# Altium PCB 新核心板PCB.PcbDoc (part 2 of 3)
Units mil, origin at the board's own origin, x right, y up, seen from the top; angles counter-clockwise.
Board outline 5840.03 x 4550.03 mil, 2 copper layers (Top Layer, Bottom Layer); 116 components, 170 nets, 698 pads, 425 vias.
Unrouted connection lines stored in the file: 1.
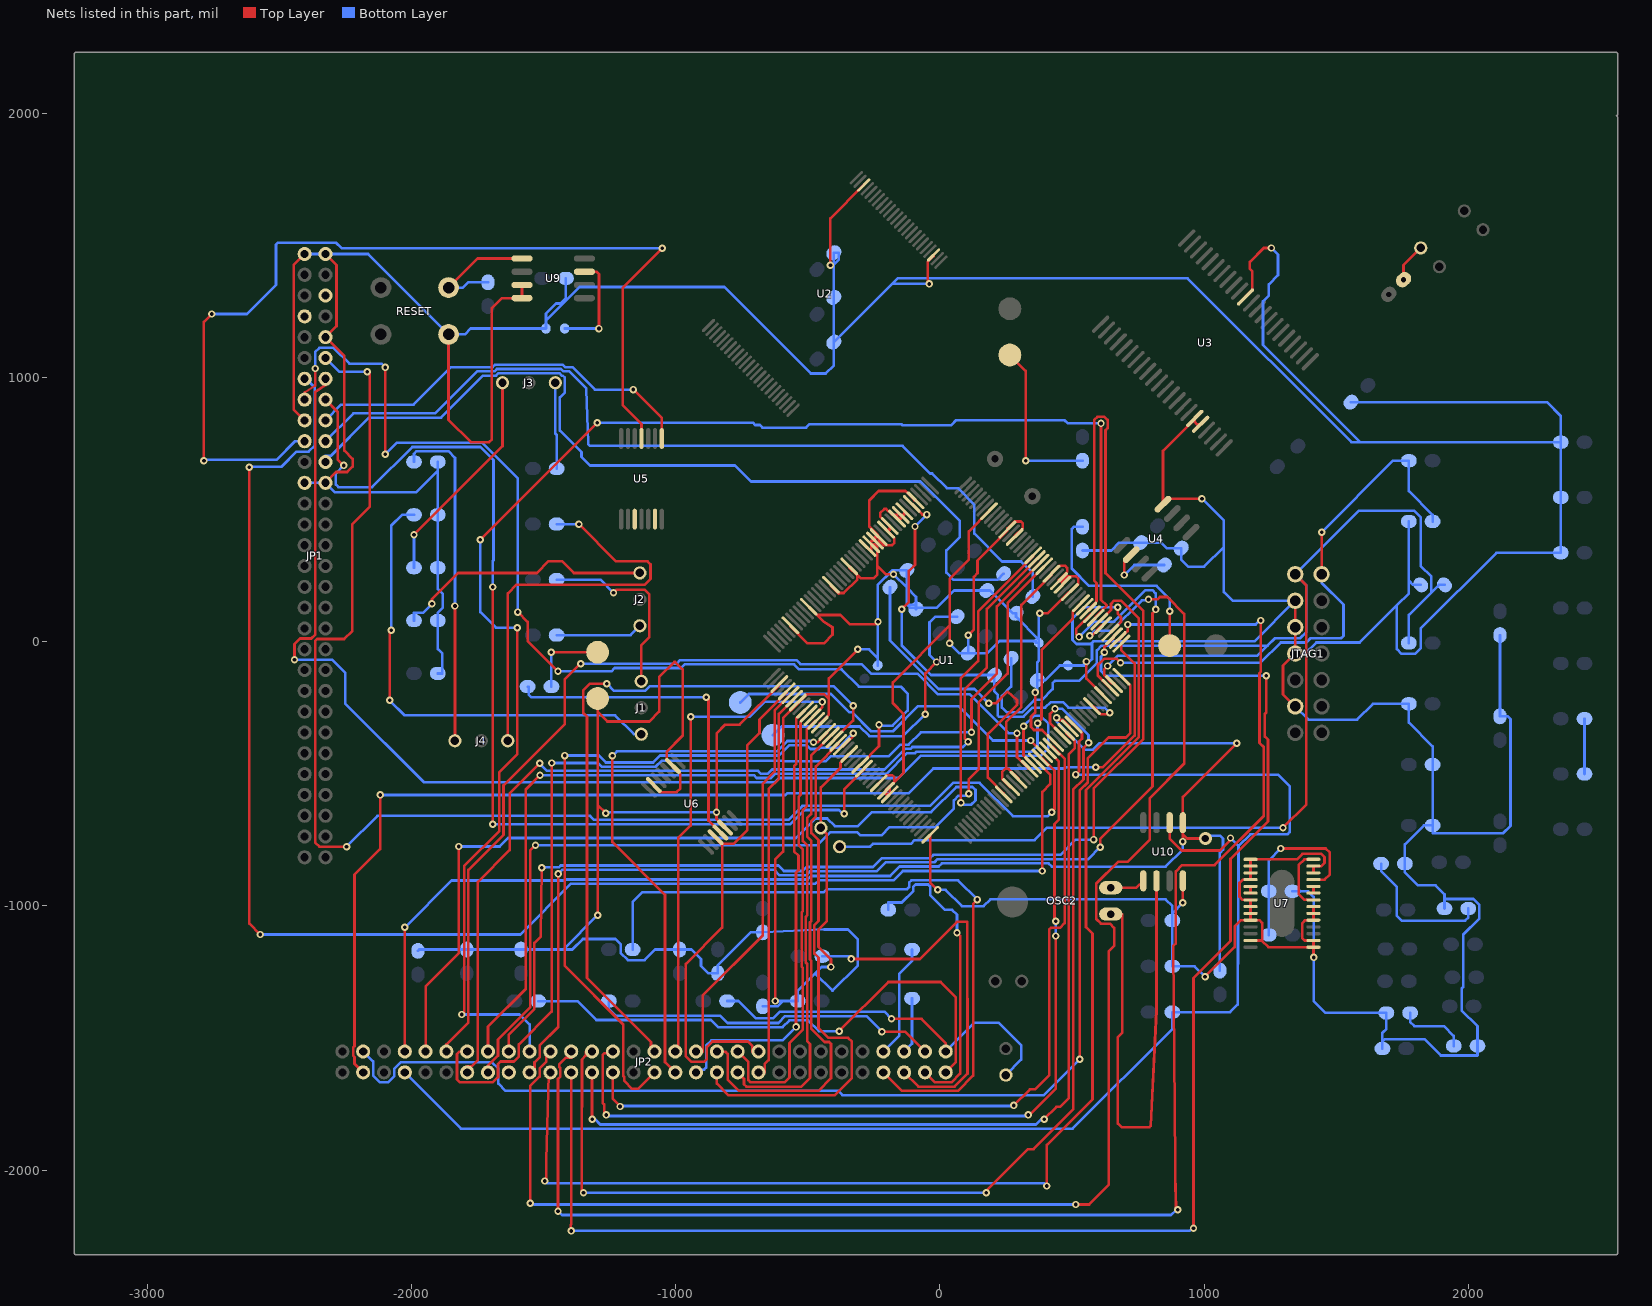
[diagram p2: the nets of this part, all layers, seen from the top]

## Via types
v1: diameter 28, hole 14, Top Layer to Bottom Layer, 424 vias
v2: diameter 50, hole 28, Top Layer to Bottom Layer, 1 vias

## Nets (pads, with @x,y where several pads share a name; then routed paths per layer and width w, separated by ;. In a path a pad name is that pad's centre, name@x,y a point inside that pad or via, vN(x,y) a via of type N, cw(c..) or ccw(c..) an arc to the next point about the centre after c; other vN are vias at no path point) (continued)
DSPREADY: C1.1 C2.1 C3.2 C4.2 C5.2 C6.2 C7.2 C8.2 C9.2 C10.2 C11.2 C12.1 C13.2 C14.2 C15.2 C16.2 C17.2 C22.2 C23.2 C24.2 C25.2 C27.2 C28.2 C29.2 C30.1 C33.2 C34.1 C38.1 C41.2 C42.2 C43.2 C44.2 C45.2 C46.1 C47.1 C48.1 C49.1 JCLK.1 JP1.37 JP1.38 JP1.44 JP1.51 JP1.59 JP1.60 JTAG1.4 JTAG1.8 JTAG1.10 JTAG1.12 PWM.K R1.2 R6.1 R8.2 R12.1 R13.1 R14.1 R15.1 R16.1 R20.1 R21.1 R22.1 R24.1 RESET.1 U1.3 U1.8 U1.14 U1.22 U1.30 U1.32 U1.33 U1.44 U1.58 U1.60 U1.70 U1.83 U1.92 U1.103 U1.105 U1.106 U1.108 U1.118 U1.120 U1.125 U1.137 U1.140 U1.141 U1.142 U1.144 U1.145 U1.147 U1.148 U1.149 U1.150 U1.155 U1.160 U1.166 U1.171 U2.27 U2.46 U3.12 U3.39 U3.40 U4.4 U6.5 U6.9 U6.13 U7.1 U7.2 U7.3 U7.4 U7.7 U7.8 U7.9 U7.10 U7.13 U7.15 U7.16 U7.19 U7.20 U7.21 U7.26 U7.27 U9.3 U9.4 U10.4 | length 43907.6
  Top Layer w10: JP1.44@-2403.74,837.44 -2445.51,879.21 -2445.51,1425.59 JP1.60@-2403.74,1467.36 ; JP1.37@-2325,601.22 -2284.22,642 -2243,642 -2222,663 -2222,692 -2253.23,723.23 -2253.23,1080.63 JP1.51@-2325,1152.4 -2283,1194.4 -2283,1425.36 JP1.59@-2325,1467.36 ; RESET.1@-1859.09,1162.83 -1859.09,839.09 -1775,755 -1706,755 -1695,766 -1695,1262 -1657,1300 U9.4@-1581.22,1300 U9.3@-1581.22,1350 ; v1(-1295,-1035) -1295,-618 ; PWM.K@-1295,-215 -1295,-265 ; v1(-1264,-649) -1295,-618 ; U6.13@-1082.38,-542.38 -1082.38,-546.04 -1058.95,-569.47 -996.47,-569.47 -982,-555 -982,-501.66 -1010,-473.66 U6.9@-1010,-470 -1034,-446 -1034,-417 -973,-356 -973,-105 -1002,-76 -1004,-76 -1062,-134 -1062,-265 -1099,-302 -1258,-302 -1295,-265 ; U6.5@-812.34,-703.85 -845,-671.19 v1(-845,-646) -844,-645 -844,-346.31 -812,-314.31 -757.16,-314.31 -607.2,-164.35 U1.3@-607.2,-160.42 ; v1(-623,-1360) -623,-824 -593,-794 -593,-289.35 U1.8@-537.6,-233.95 ; U1.171@-565.44,62.29 -565.44,58.36 -500.74,-6.33 -438.96,-6.33 -406.03,26.6 -406.03,55 -439.18,75.22 U1.166@-464.95,101 ; U1.8@-537.6,-230.02 U1.8@-537.6,-233.95 ; U1.166@-495.84,131.89 U1.166@-464.95,101 ; U1.14@-454.08,-313.53 -454.08,-309.61 -420,-275.52 -420,-216 ; v1(-414,1425) -414,1602.23 U2.46@-288.11,1728.11 ; U1.160@-412.32,215.4 -412.32,211.48 -382.88,182.04 -380.92,184 -364,184 -311.9,236.1 -311.9,250.25 -342.73,281.07 U1.155@-342.73,285 -297.73,240 -251.14,240 -236.14,255 -236.14,287.14 ; v1(-412,-1231) -412,-1202 -459,-1155 -459,-1089 -427.76,-1057.76 -427.76,-727.25 JCLK.1@-450,-705.01 -450,-551.1 -376,-477.1 -376,-458.16 U1.22@-342.73,-424.89 ; v1(-310,-29) -420,-139 -420,-216 ; U1.150@-273.13,354.6 -259.21,340.68 U1.149@-259.21,368.52 ; v1(-234,75) -243,66 -341,66 -376,101 U1.166@-464.95,101 ; U1.30@-231.37,-536.24 -200.13,-505 -180,-505 -172,-513 -172,-528.62 -203.53,-560.16 U1.32@-203.53,-564.08 -203.53,-578 U1.33@-189.61,-578 -189.61,-549.23 -137.62,-497.23 -137.62,-273.38 -178,-233 -178,-154 37,61 ; v1(-175.15,255) -204,255 -236.14,287.14 ; U1.140@-133.94,493.79 -133.94,479.87 U1.141@-147.86,479.87 -147.86,465.95 U1.142@-161.78,465.95 -161.78,479.87 -179.62,479.87 -202.75,503 -210,503 -226,487 -226,474.5 U1.144@-189.61,438.11 -189.61,424.19 U1.145@-203.53,424.19 -172,392.66 -172,373 -180,365 -213.93,365 -231.37,382.44 U1.147@-231.37,396.36 U1.147@-234.36,396.36 ; U1.137@-92.18,535.55 -96.11,535.55 -130.56,570 -232,570 -267,535 -267,435.91 -234.36,403.27 U1.147@-234.36,396.36 ; v1(-40,1354) -46,1360 -46,1436.51 -23.64,1458.86 U2.27@-23.64,1463.64 ; U1.44@-36.5,-731.12 -36.5,-910.5 v1(-8,-939) ; v1(37,-6) 37,61 ; v1(107.66,24.63) 129,45.96 129,245.18 142.82,259 142.82,307.28 255.81,420.27 U1.120@255.81,424.19 255.81,428.12 282.7,455.02 306.45,455.02 314.47,447 314.47,431.11 283.64,400.28 U1.118@283.64,396.36 ; U1.125@186.21,493.79 110,417.58 110,311 37,238 37,61 ; U1.58@269.73,-550.16 265.8,-550.16 236,-520.37 236,-492.37 247.27,-481.1 251,-481.1 ; U1.60@297.56,-522.33 297.56,-518.4 260.27,-481.1 251,-481.1 ; v1(361,-192) 361,-268 345,-284 345,-323 356,-334 387.63,-334 U1.70@436.76,-383.13 ; v1(378.22,107.06) 408,107.06 488.51,187.56 U1.103@492.44,187.56 524,219.13 524,239 516,247 482.28,247 464.6,229.32 ; U1.105@464.6,215.4 464.6,229.32 ; v1(554.88,-75) 554.88,-139.35 U1.83@617.71,-202.18 ; U1.92@645.55,34.45 686,74.9 686,93 673,106 v1(673,130) ; v1(920,-988) U10.4@920,-905 ; U3.39@964.98,845.02 U3.39@964.98,842.27 ; U3.40@987.25,822.75 973.24,822.75 964.98,831 U3.39@964.98,842.27 ; v1(992,541) 865.29,541 U4.4@844.64,520.36 844.64,721.93 U3.39@964.98,842.27 ; v1(1004,-1268) 1116,-1156 1116,-1077.98 1140,-1053.98 U7.10@1176,-1053.98 ; U3.12@1157.07,1304.36 1157.07,1306.11 1182.82,1331.86 1182.82,1401.57 1173.36,1411.03 1173.36,1437.36 1226,1490 v1(1255,1490) ; U7.13@1176,-1130.75 1217.75,-1130.75 1220,-1133 ; JTAG1.4@1345,-245 1299,-199 1299,-91 JTAG1.8@1345,-45 JTAG1.10@1345,55 JTAG1.12@1345,155 ; U7.21@1414,-1002.8 U7.20@1414,-1028.39 U7.19@1414,-1053.98 1383.02,-1053.98 1372,-1065 1372,-1122.75 1380,-1130.75 U7.16@1414,-1130.75 U7.15@1414,-1156.34 ; U7.26@1414,-874.84 U7.27@1414,-849.25 1444,-849.25 1456,-837.25 1456,-814.66 1444,-802.66 1372,-802.66 1351,-823.66 U7.1@1176,-823.66 U7.2@1176,-849.25 U7.3@1176,-874.84 U7.4@1176,-900.43 1146.57,-900.43 1134,-913 1134,-965 1146.2,-977.2 U7.7@1176,-977.2 U7.8@1176,-1002.8 U7.9@1176,-1028.39 U7.10@1176,-1053.98 ; v1(1415,-1195) 1414,-1194 U7.15@1414,-1156.34 ; -1295,-618 -1295,-265 ; U1.8@-537.6,-233.95 -502.65,-199 -437,-199 -420,-216 ; U1.149@-259.21,368.52 -259.21,382.44 U1.148@-245.29,382.44 -245.29,396.36 U1.147@-234.36,396.36 ; U1.149@-259.21,368.52 -245.66,368.52 -236.14,359 -236.14,354.6 -236.14,287.14 ; 251,-481.1 251,-304 308.61,-246.39 308.61,139.01 422.84,253.23 U1.108@422.84,257.16 453.68,288 473,288 482,279 482,264.57 450.68,233.25 U1.106@450.68,229.32 464.6,229.32 ; U7.10@1176,-1053.98 1210,-1053.98 1220,-1063.98 1220,-1133 ; 1220,-1133 1243.34,-1156.34 U7.15@1414,-1156.34
  Bottom Layer w10: JP1.38@-2403.74,601.22 JP1.37@-2325,601.22 -2288.78,565 -1982,565 -1900,647 ; JP1.60@-2403.74,1467.36 JP1.59@-2325,1467.36 -2163.62,1467.36 RESET.1@-1859.09,1162.83 -1797.52,1162.83 -1775.35,1185 C12.1@-1490.43,1185 -1490.43,1215 ; C49.1@-1975,-1170 -1970,-1165 C42.2@-1790,-1165 C46.1@-1585,-1165 -1425,-1165 ; C23.2@-1900,-120.28 -1882.5,-120.28 -1882.5,-45.09 -1900,-27.59 R13.1@-1900,79.86 -1900,110 -1881,129 -1881,180 -1900,199 R14.1@-1900,280 R12.1@-1900,480.14 -1900,647 ; R15.1@-1900,680.28 -1900,647 ; C11.2@-1415,1375 -1415,1301 -1436,1280 -1452,1280 -1490.43,1241.57 -1490.43,1215 ; v1(-1295,-1035) -1425,-1165 ; v1(-1264,-649) -1261,-646 v1(-845,-646) ; C47.1@-670,-1380 -614,-1380 -594,-1360 ; v1(-623,-1360) -594,-1360 ; v1(-414,1425) -404,1425 v1@-401.16,1427.84 ; v1(-412,-1231) -447.5,-1231 -471.75,-1255.25 ; v1(-310,-29) -268,-29 -234.94,-62.06 ; R1.2@-234.94,-89.94 -234.94,-62.06 ; v1(-234,75) v1@-234.94,74.06 ; v1(-175.15,255) -125,204.85 ; R22.1@-89.87,123.05 R22.1@-89.87,128.46 ; v1(-40,1354) -180.6,1354 ; v1(-8,-939) 21.35,-939 83.35,-1001 165.86,-1001 191.86,-975 854,-975 880,-1001 880,-1028 ; v1(37,-6) 75,-44 107.66,-44 R24.1@107.66,-43.58 ; v1(107.66,24.63) R24.1@107.66,-43.58 ; v1(361,-192) 369,-184 C3.2@369,-146.56 ; v1(378.22,107.06) 374.22,103.06 C1.1@374.22,9 ; R6.1@540,345 649,345 679,375 C28.2@760,375 837,375 858.36,353.64 C29.2@913.64,353.64 913.64,310.36 940,284 999.91,284 1075,359.09 ; v1(554.88,-75) 539.83,-90.05 ; v1(673,130) 545,130 502,87 502,7 518,-9 571.77,-9 576.25,-4.52 ; v1(920,-988) 880,-1028 ; v1(992,541) 1075,458 1075,359.09 ; v1(1004,-1268) 964.62,-1228.62 C22.2@880,-1228.62 C10.2@880,-1055.28 880,-1028 ; v1(1255,1490) 1280,1465 1280,1387.42 1245,1352.42 1245,1309.71 1223.36,1288.06 1223.36,1122.64 1591,755 ; R16.1@1335,-944.72 1393.72,-944.72 1415,-966 v1(1415,-1195) 1415,-1360 1460,-1405 C30.1@1690,-1405 1690,-1465 1675,-1480 1675,-1513 ; JTAG1.4@1345,-245 1395,-295 1579.19,-295 1639,-235.19 C14.2@1775,-235.19 1775,-306 1865,-396 C17.2@1865,-465.24 R8.2@1865,-695.28 ; JTAG1.8@1345,-45 1383,-45 1425,-3 1589,-3 1730,138 ; C13.2@1556.16,906.56 2298.44,906.56 2350,855 C8.2@2350,755 ; C34.1@1675,-1540 1675,-1513 ; C15.2@1775,454.95 1775,231 ; C16.2@1820,215 1791,215 1775,231 ; C41.2@1910,-1010 1910,-974 ; C5.2@2120,25 C9.2@2120,-282.5 2150,-282.5 2160,-292.5 2160,-697 2132,-725 1865,-725 R8.2@1865,-695.28 ; -1490.43,1215 -1362.99,1342.44 -815.44,1342.44 -488,1015 -432,1015 -401.16,1045.84 C27.2@-401.16,1133.44 ; -1425,-1165 -1391,-1165 -1351,-1125 -1227.5,-1125 -1207.5,-1145 -1207.5,-1177.5 -1180,-1205 -1117,-1205 -1077,-1165 C43.2@-984.72,-1165 -940,-1165 -904,-1201 -904,-1227 -876,-1255 C45.2@-840,-1255 -840,-1224 -716,-1100 C48.1@-670,-1100 -437,-1089 -348,-1089 -310,-1127 -310,-1225 -406,-1321 -471.75,-1255.25 ; -594,-1360 C44.2@-537.5,-1360 -537.5,-1321 -471.75,-1255.25 ; C27.2@-401.16,1133.44 -180.6,1354 ; C27.2@-401.16,1133.44 C24.2@-401.16,1302.66 v1@-401.16,1427.84 ; v1@-401.16,1427.84 -382,1447 -382,1471.88 C25.2@-401.16,1471.88 v1@-401.16,1427.84 ; -234.94,-62.06 v1@-234.94,74.06 ; v1@-234.94,74.06 -234.94,215 -179.94,270 C4.2@-125,270 -125,204.85 ; -180.6,1354 -159.6,1375 937.83,1375 1557.83,755 1591,755 ; -125,149 -125,204.85 ; -125,149 -125,140 -113.46,128.46 R22.1@-89.87,128.46 ; -125,149 -116,140 R22.1@-89.87,140 ; -125,204.85 -89.87,169.72 R22.1@-89.87,140 ; R22.1@-89.87,128.46 R22.1@-89.87,140 ; R22.1@-89.87,128.46 -10.92,128.46 54.43,193.82 R20.1@177.82,193.82 190,193.82 276.27,107.54 R21.1@288.54,107.54 288.54,94.67 C1.1@374.22,9 ; R24.1@107.66,-43.58 180,-43.58 226.28,2.7 363.76,2.7 363.76,-3.78 C1.1@374.22,-3.78 ; C3.2@369,-146.56 398,-146.56 454.51,-90.05 C2.1@484.95,-90.05 ; C3.2@369,-146.56 C3.2@368.84,-146.56 368.84,-78 374.22,-72.62 C1.1@374.22,-3.78 ; C1.1@374.22,-3.78 C1.1@374.22,9 ; C2.1@484.95,-90.05 539.83,-90.05 ; C2.1@484.95,-90.05 484.95,-91 538.88,-91 539.83,-90.05 ; 539.83,-90.05 552.6,-90.05 576.25,-66.4 576.25,-4.52 ; 576.25,-4.52 581.77,1 1191,1 JTAG1.12@1345,155 1108,155 1075,188 1075,359.09 ; 1591,755 C8.2@2350,755 ; 1675,-1513 1684,-1504 1834,-1504 1896,-1566 2035,-1566 C33.2@2035,-1530 2035,-1455 1975,-1395 1975,-1312 1981,-1306 1981,-1109 2041,-1049 2041,-995 2020,-974 1910,-974 ; 1730,138 1730,-28 1748,-46 1799,-46 1820,-25 1820,50 2106.43,336.43 C6.2@2350,336.43 C7.2@2350,545.71 C8.2@2350,755 ; 1730,138 1775,183 1775,231 ; R8.2@1865,-695.28 1831.72,-695.28 1760,-767 C38.1@1760,-840 1760,-873 1809,-922 1876,-922 1910,-956 1910,-974
ECAP1: JP2.33 U1.68 | length 3328.3
  Top Layer w10: v1(-1261.84,-1791) -1269.49,-1783.35 -1269.49,-1752.51 -1276,-1746 -1276,-1563.49 -1270.14,-1557.63 -1243.81,-1557.63 JP2.33@-1237.44,-1551.26 ; v1(335,-1791) 339,-1791 439,-1691 v1(439,-1114) ; U1.68@408.92,-410.97 449.94,-451.99 449.94,-674.06 434,-690 434,-1053 v1(439,-1058)
  Bottom Layer w10: v1(-1261.84,-1791) -1257.84,-1795 331,-1795 v1(335,-1791) ; v1(439,-1114) v1(439,-1058)
ECAP2: JP2.34 U1.69 | length 3123.6
  Top Layer w10: JP2.34@-1237.44,-1630 -1237.44,-1729.87 -1210,-1757.31 v1(-1210,-1759) ; v1@277.5,-1757.5 340.64,-1694.36 360.64,-1694.36 413.63,-1641.37 413.63,-1089.97 420.6,-1083 454,-1083 472.21,-1064.79 472.21,-442.5 426.76,-397.05 U1.69@422.84,-397.05
  Bottom Layer w10: v1(-1210,-1759) -1208.5,-1757.5 v1@277.5,-1757.5
  other v1: 280,-1755
ECAP3: JP2.35 U1.72 | length 4294.2
  Top Layer w10: v1(-1348.46,-2086) -1355,-2079.46 -1355,-1760.5 -1354,-1759.5 -1354,-1581 -1340,-1567 -1340,-1551.26 JP2.35@-1316.18,-1551.26 ; v1(175.22,-2086) 175.22,-2078.43 333.26,-1920.39 354.61,-1920.39 505,-1770 505,-560 544,-521 544,-402 v1(563,-383) ; v1(436,-254) 417,-273 417,-307.69 U1.72@464.6,-355.29
  Bottom Layer w10: v1(-1348.46,-2086) v1(175.22,-2086) ; v1(436,-254) 464,-254 563,-353 v1(563,-383)
ECAP4: JP2.36 U1.73 | length 3439.3
  Top Layer w10: JP2.36@-1316.18,-1630 -1316.02,-1630.16 -1316.02,-1806.84 v1(-1315.87,-1807) ; v1(395,-1807) 441.64,-1760.36 454.64,-1760.36 488.21,-1726.79 488.21,-425.7 511,-402.92 511,-377.78 478.52,-345.3 U1.73@478.52,-341.37
  Bottom Layer w10: v1(-1315.87,-1807) -1305.04,-1807 -1285.04,-1827 364.18,-1827 384.18,-1807 v1(395,-1807)
ECAP5: JP2.57 U1.88 | length 4560.1
  Top Layer w10: v1(530,-1580) 530,-562 560,-532 560,-441 638.46,-362.54 704.46,-362.54 721,-346 721,-166.27 U1.88@687.31,-132.58
  Bottom Layer w10: JP2.57@-2182.32,-1551.26 -2144.55,-1589.03 -2144.55,-1642.45 -2119.23,-1667.77 -2087.94,-1667.77 -2064.21,-1644.05 -2064.21,-1615.95 -2040.49,-1592.23 -1694.24,-1592.23 -1671,-1615.46 -1671,-1673 -1644,-1700 -384,-1700 -368,-1716 394,-1716 v1(530,-1580)
ECAP6: JP2.58 U1.89 | length 4424.5
  Top Layer w10: JP2.58@-2182.32,-1630 -2215,-1597.32 -2215,-1572 -2220.09,-1566.91 -2220.09,-1535.61 -2215,-1530.52 -2215,-882 -2118,-785 v1(-2118,-580) ; v1(590,-475) 617,-475 737.11,-354.89 737.11,-82.39 687.31,-32.59 U1.89@687.31,-7.31
  Bottom Layer w10: v1(-2118,-580) -583.91,-580 -576.92,-573.01 -117.16,-573.01 -24.15,-480 473,-480 478,-475 v1(590,-475)
EMU0: C15.1 JTAG1.13 R5.1 U1.85 | length 2229.8
  Top Layer w10: U1.85@645.55,-174.34 644.27,-174.34 597.77,-127.85 597.77,-89 621.77,-65 669.77,-65 v1(684,-79.23) ; JTAG1.13@1445,255 v1(1445,414)
  Bottom Layer w10: v1(684,-79.23) 1214.27,-79.23 1290.5,-3 1387,-3 1403,13 1519,13 1528,22 1528,140 1445,223 JTAG1.13@1445,255 ; v1(1445,414) 1716,685 R5.1@1775,685 1775,570 1865,480 C15.1@1865,454.95
EMU1: C16.1 JCLK.2 JTAG1.14 R7.1 R26.2 U1.86 | length 6388.1
  Top Layer w10: v1(635,-92) 622.84,-104.16 622.84,-127.72 652.55,-157.43 659.47,-157.43 U1.86@659.47,-160.42 ; v1(1299,-704) 1387,-616 1387,213 JTAG1.14@1345,255
  Bottom Layer w10: JCLK.2@-379.29,-775.72 -264,-775.72 -253.28,-765 -109,-765 -95,-751 358.35,-751 405.35,-704 v1(1299,-704) ; R26.2@270.07,-63.25 270.07,-169.76 235,-204.83 235,-249 253.62,-267.62 310.69,-267.62 358.07,-220.24 386.4,-220.24 427,-179.64 427,-157 436,-148 526.82,-148 594,-80.82 594,-33 612,-15 1240,-15 ; v1(635,-92) 673.16,-53.84 1201.16,-53.84 1240,-15 ; R7.1@1775,-5.14 1775,101.13 1860,186.13 ; C16.1@1910,215 1888.87,215 1860,186.13 ; 1240,-15 1268,13 1364,13 1387,36 1387,213 JTAG1.14@1345,255 1585,495 1796,495 1820,471 1820,285.91 1860,245.91 1860,186.13
EQEP1A: JP2.37 U1.90 | length 6045.1
  Top Layer w10: v1(-1445,-2155) -1445,-1654.76 -1435.89,-1645.65 -1435.89,-1614.35 -1440,-1610.24 -1440,-1599 -1416,-1575 -1394.92,-1575 JP2.37@-1394.92,-1551.26 ; U1.90@673.39,6.61 677.32,6.61 711,40.3 v1(711,65) ; v1(900,-2150) 894.14,-2150 891,-2015.51 891,-1973.02 884,-1158.66 884,-1150.37 886.93,-1147.44 893,-1141.37 893,-869 916,-846 1040,-846 1226,-660 1226,-399 1210,-383 1210,-118.64 1215,-113.64 v1(1215,80)
  Bottom Layer w10: v1(-1445,-2155) -1430,-2170 875.13,-2170 895.13,-2150 v1(900,-2150) ; v1(711,65) 1195.13,65 1210.13,80 v1(1215,80)
EQEP1B: JP2.38 U1.91 | length 5961.9
  Top Layer w10: v1(-1395,-2230) -1396.99,-2228.01 -1396.99,-2206.99 -1394.96,-2204.96 -1394.96,-1630.04 JP2.38@-1394.92,-1630 ; v1(623,-40) 623,-19.86 656.48,13.62 656.48,20.53 U1.91@659.47,20.53 ; v1(960,-2220) 960,-1273 1100,-1133 1100,-822 1242,-680 1242,-371 1230,-359 1230,-273.34 1235,-268.34 v1(1235,-129)
  Bottom Layer w10: v1(-1395,-2230) 945.13,-2230 955.13,-2220 v1(960,-2220) ; v1(623,-40) 623,-43 610,-56 610,-111 628,-129 v1(1235,-129)
EQEP1I: JP2.40 U1.95 | length 4859.1
  Top Layer w10: v1(-1495,-2041) -1490,-2036 -1490,-1965.15 -1490,-1964.85 -1480,-1636.34 JP2.40@-1473.66,-1630 ; v1(405,-2060) 405,-1905 578,-1732 578,-1104.63 553.53,-1080.16 553.53,-561.1 753.11,-361.51 753.11,87.89 686,155 660,155 648,143 648,120.42 U1.95@603.79,76.21
  Bottom Layer w10: v1(-1495,-2041) -1488.93,-2047.07 -1486,-2050 395,-2050 397.93,-2052.93 v1(405,-2060)
EQEP1S: JP2.39 U1.94 | length 5716.6
  Top Layer w10: v1(-1550,-2125) -1550,-1681.02 -1514.63,-1645.65 -1514.63,-1614.91 -1488.75,-1589.03 -1488.75,-1566.35 JP2.39@-1473.66,-1551.26 ; v1(515,-2130) 565,-2130 640,-2055 640,-1171 660,-1151 660,-1083.06 644,-1067.06 610.11,-1067.06 592.05,-1049 592.05,-915.95 675,-833 711,-833 795,-749 795,-592 925,-462 925,105 861,169 832.44,169 823.44,160 v1(790,160) ; v1(567,22) 573.49,22 613.78,62.29 U1.94@617.71,62.29
  Bottom Layer w10: v1(-1550,-2125) -1546.56,-2128.44 -1536.7,-2128.44 -1535.14,-2130 v1(515,-2130) ; v1(567,22) 587,42 650,42 764.56,156.56 786.56,156.56 v1(790,160)
EXINT1: JP1.48 U1.65 | length 5856.2
  Top Layer w10: v1(-2613,660) -2613,-1067 v1(-2572,-1108) ; U1.65@367.16,-452.73 417.94,-503.5 417.94,-539.07 388,-569.01 v1(388,-868)
  Bottom Layer w10: v1(-2613,660) -2611,662 -2491,662 -2434,719 -2389,719 -2365,743 -2365,961 -2382,978 -2382,994.92 JP1.48@-2403.74,994.92 ; v1(-2572,-1108) -1587.52,-1108 -1395.52,-916 -471,-916 -458,-903 -175,-903 -140,-868 v1(388,-868)
EXINT2: JP1.49 U1.66 | length 5309.6
  Top Layer w10: v1(-2245,-776) -2348,-776 -2363,-761 -2363,4 -2357,10 -2254,10 -2223,41 -2223,445 -2158,510 -2158,1012 v1(-2167,1021) ; U1.66@381.08,-438.81 385.01,-438.81 433.94,-487.74 433.94,-635.06 v1(424,-645)
  Bottom Layer w10: JP1.49@-2325,1073.66 -2272.34,1021 v1(-2167,1021) ; v1(-2245,-776) -2128,-659 -1323,-659 -1308,-674 -572.54,-674 -519.54,-621.01 -36.59,-621.01 50.41,-534 151,-534 277,-660 409,-660 v1(424,-645)
EXNMI: JP1.47 U1.64 | length 4684.2
  Top Layer w10: v1(-2442,-68) -2442,-9 -2421,12 -2378.77,12 -2363,27.77 -2363,945.37 -2325,971 JP1.47@-2325,994.92 ; v1(317,-320) 317,-430.41 U1.64@353.24,-466.65
  Bottom Layer w10: v1(-2442,-68) -2300,-68 -2250.5,-117.5 -2250.5,-233.8 -1952.3,-532 -623.67,-532 -607.68,-516 -156.18,-516 -72.17,-432 382,-432 411,-403 411,-310 382,-281 356,-281 v1(317,-320)
EXTCS0: JP1.43 U5.8 | length 1520.9
  Top Layer w10: v1(-1160,954) -1052.18,846.18 U5.8@-1052.18,768.9
  Bottom Layer w10: JP1.43@-2325,837.44 -2265.44,897 -1992,897 -1850,1039 -1692.17,1039 -1683.17,1048 -1426.83,1048 -1417.83,1039 -1389.78,1039 -1304.78,954 v1(-1160,954)
EXTCS1: JP1.42 U5.11 | length 3705.1
  Top Layer w10: v1(-2785,685) -2785,1210 v1(-2755,1240) ; U5.11@-1128.95,768.9 -1128.95,823.95 -1200,895 -1200,1339 v1(-1050,1489)
  Bottom Layer w10: v1(-2785,685) -2781,689 -2509.03,689 -2439.32,758.7 JP1.42@-2403.74,758.7 ; v1(-2755,1240) -2622.63,1240 -2512,1350.63 -2512,1503.28 -2506.14,1509.14 -2284.14,1509.14 -2264,1489 v1(-1050,1489)
FLASHCS: U5.3
HOLDAN: JP1.45 U1.26 | length 3986.1
  Top Layer w10: JP1.45@-2325,916.18 -2279,870.18 -2279,690 v1(-2256,667) ; v1(-1692,-691) v1(-1692,207) ; v1(-362,-651) -362,-559.44 -287.05,-484.49 U1.26@-287.05,-480.57
  Bottom Layer w10: v1(-2256,667) -2286,637 -2286,595 -2276,585 -2148,585 -1996,737 -1738.63,737 -1689,687.37 -1689,308.39 -1692,305.39 v1(-1692,207) ; v1(-1692,-691) -566.91,-691 -512.92,-637.01 -382,-637.01 -368.01,-651 v1(-362,-651)
HOLDDN: JP1.46 U1.25 | length 3961.6
  Top Layer w10: JP1.46@-2403.74,916.18 -2403.74,943 -2364,969.2 v1(-2364,1034) ; v1(-2099,709) v1(-2099,1038) ; v1(-1597,112) -1560,75 -1560,3 v1(-1445,-112) ; U1.25@-300.97,-466.65 -230,-395.68 v1(-230,-314)
  Bottom Layer w10: v1(-2364,1034) -2364,1096 -2348,1112 -2294,1112 -2234,1052 -2113,1052 v1(-2099,1038) ; v1(-2099,709) -2055,753 -1732,753 -1597,618 v1(-1597,112) ; v1(-1445,-112) -1242.87,-112 -1230.66,-99.79 -979.29,-99.79 -965.5,-86 -551.93,-86 -533,-104.93 -371.24,-104.93 -306,-170.16 -147.78,-170.16 -121.51,-196.43 -121.51,-260.82 -178.38,-317.69 -226.31,-317.69 v1(-230,-314)
MCLKRA: JP2.45 U1.100 | length 3673.3
  Top Layer w10: JP2.45@-1709.88,-1551.26 -1710,-1551.26 -1710,-1457 -1566.5,-1313.5 -1566.5,-558.5 v1(-1513,-505) ; v1(370,-309) 385,-294 385,-232 386,-231 386,-30 503.37,87.37 503.37,114.98 U1.100@534.19,145.81
  Bottom Layer w10: v1(-1513,-505) -704,-505 -693,-516 -639.67,-516 -623.68,-500 -202.28,-500 -123.96,-421.69 -93.86,-421.69 -88.17,-416 347,-416 370,-393 v1(370,-309)
MCLKRB: JP2.47 U1.111 | length 4009.1
  Top Layer w10: JP2.47@-1788.62,-1551.26 -1817.26,-1551.26 -1827,-1561 -1827,-1657 -1816,-1668 -1692,-1668 -1672,-1648 -1672,-1598.8 -1662.24,-1589.03 -1612,-1589.03 -1593.37,-1570.4 -1593.37,-1524.11 -1469,-1399.74 v1(-1469,-459) ; v1(120,-343) 120,-217 216,-121 216,133.84 U1.111@381.08,298.92
  Bottom Layer w10: v1(-1469,-459) -1294,-459 -1280,-473 -1075,-473 -1052,-450 -595.19,-450 -593.19,-452 -431,-452 -413,-434 -193.52,-434 -149.21,-389.69 -117.89,-389.69 -71.2,-343 v1(120,-343)
MFSRA: JP2.46 U1.110 | length 3661.5
  Top Layer w10: JP2.46@-1709.88,-1630 -1709.88,-1604.68 -1672,-1566.8 -1672,-1505.5 -1550.5,-1384 -1550.5,-790.5 v1(-1530,-770) ; v1(110,-575) 110,-520 147,-483 147,-231 257,-121 257,147 U1.110@395,285
  Bottom Layer w10: v1(-1530,-770) -463,-770 -414,-721 -312.86,-721 -300.86,-733 -221,-733 -189.69,-701.69 -16.69,-701.69 52.84,-632.16 52.84,-601 70.99,-582.85 102.15,-582.85 v1(110,-575)
MFSRB: JP2.48 U1.112 | length 3790.4
  Top Layer w10: JP2.48@-1788.62,-1630 -1788.62,-1607 -1772,-1607 -1748,-1583 -1748,-909 -1628,-789 -1628,-574 v1(-1514.5,-460.5) ; v1(107.07,-378.93) 95,-366.86 95,-179.81 178,-96.81 178,123.68 U1.112@367.16,312.84
  Bottom Layer w10: v1(-1514.5,-460.5) -1486,-489 -688,-489 -677,-500 -651.2,-500 -635.2,-484 -209.94,-484 -131.63,-405.69 -111.12,-405.69 -104.17,-398.74 87.26,-398.74 v1(107.07,-378.93)
Net+3.3V_K: +3.3V.K R6.2 | length 778.5
  Top Layer w10: +3.3V.K@870,-5 v1(870,115)
  Bottom Layer w10: R6.2@540,435 508,435 500,427 500,276 565,211 821,211 870,162 v1(870,115)
Net+5V_A: +5V.A R9.2 | length 639.9
  Top Layer w10: +5V.A@265,1085 325,1025 v1(325,685)
  Bottom Layer w10: v1(325,685) R9.2@540,685
NetC4_1: C4.1 U1.56 | length 1238.5
  Top Layer w10: v1(185,-233) 213,-233 257,-189 292,-220.79 292,-238.79 182,-348.79 182,-514.19 241.89,-574.08 U1.56@241.89,-578
  Bottom Layer w10: C4.1@-188.64,206.36 -188.64,5.32 -4.32,-179 131,-179 v1(185,-233)
NetC12_2: C12.2 U9.7 | length 394.3
  Top Layer w10: U9.7@-1345,1400 -1299,1400 -1290,1391 v1(-1290,1185)
  Bottom Layer w10: C12.2@-1419.57,1185 v1(-1290,1185)
NetC18_1: C18.1 C19.1 | length 209.3
  Bottom Layer w10: C18.1@2440,-500.71 C19.1@2440,-291.43
NetC29_1: C29.1 U4.6 | length 254.7
  Top Layer w10: v1(698.5,252.5) 698.5,303.5 U4.6@724.44,329.44
  Bottom Layer w10: v1(698.5,252.5) 736,290 C29.1@850,290
NetC30_2: C30.2 C33.1 | length 259
  Bottom Layer w10: C30.2@1780,-1405 1780,-1439 1796,-1455 1908,-1455 1945,-1492 C33.1@1945,-1530
NetC38_2: C38.2 C41.1 | length 539.3
  Bottom Layer w10: C38.2@1670,-840 1670,-868 1729,-927 1729,-1037 1748,-1056 1988,-1056 2000,-1044 C41.1@2000,-1010
NetJ1_1: J1.1 R12.2 | length 1771.5
  Top Layer w10: v1(-2082,-222) -2082,37 v1(-2076,43)
  Bottom Layer w10: v1(-2082,-222) -2024.9,-279.1 -1229.03,-279.1 -1158.13,-350 J1.1@-1130,-350 ; v1(-2076,43) -2076,439 -2034.86,480.14 R12.2@-1990,480.14
NetJ1_3: J1.3 Rsx1.1 | length 725.1
  Top Layer w10: v1(-1234.86,185) -1223.86,196 -1116,196 -1099,179 -1099,17 -1130,-14 J1.3@-1130,-150
  Bottom Layer w10: Rsx1.1@-1450,234.86 -1284.72,234.86 v1(-1234.86,185)
NetJ2_1: J2.1 R13.2 | length 994.5
  Top Layer w10: v1(-1922,143) -1922,161 -1823,260 -1525,260 -1480,305 -1429.94,305 -1384.94,260 J2.1@-1135,260
  Bottom Layer w10: R13.2@-1990,79.86 -1990,109 -1956,109 v1(-1922,143)
NetJ2_3: J2.3 Rsx2.1 | length 329.6
  Bottom Layer w10: Rsx2.1@-1450,24.79 -1170.21,24.79 J2.3@-1135,60
NetJ3_1: J3.1 R14.2 | length 838.8
  Top Layer w10: v1(-1990,405) -1655,740 J3.1@-1655,980
  Bottom Layer w10: R14.2@-1990,280 v1(-1990,405)
NetJ3_3: J3.3 Rsx3.1 | length 327.1
  Bottom Layer w10: J3.3@-1455,980 -1455,788 -1450,783 Rsx3.1@-1450,655
NetJ4_1: J4.1 R15.2 | length 1271.2
  Top Layer w10: J4.1@-1835,-375 v1(-1835,135)
  Bottom Layer w10: R15.2@-1990,680.28 -1990,711 -1980,721 -1860,721 -1835,696 v1(-1835,135)
NetJ4_3: J4.3 Rsx4.1 | length 1594.2
  Top Layer w10: J4.3@-1635,-375 -1635,183 -1602,216 -1116,216 -1095,237 -1095,292.81 -1106.36,304.17 -1224.96,304.17 v1(-1365.71,444.93)
  Bottom Layer w10: Rsx4.1@-1450,444.93 v1(-1365.71,444.93)
NetJ5_1: J5.1 U8.2 | length 146.9
  Top Layer w10: U8.2@1755,1370 1755,1425 J5.1@1820,1490
NetJ6_1: J6.1 JP2.1 R30.2 | length 1449.2
  Top Layer w10: v1(-182.65,-1427.35) -69.38,-1427.35 22.4,-1519.13 JP2.1@22.4,-1551.26
  Bottom Layer w10: R30.2@-805,-1360 -762,-1360 -697,-1425 -630,-1425 -605,-1400 -210,-1400 v1(-182.65,-1427.35) ; JP2.1@22.4,-1551.26 131.66,-1442 223,-1442 308,-1527 308,-1582 J6.1@250,-1640
NetJP2_2: JP2.2 R34.2 | length 2050.7
  Top Layer w10: v1(-381,-1474) -195,-1288 3,-1288 61,-1346 61,-1591.4 JP2.2@22.4,-1630
  Bottom Layer w10: R34.2@-1520,-1360.28 -1371.72,-1360.28 -1300,-1432 -866.08,-1432 -839.08,-1459 -595,-1459 -569,-1433 -499,-1433 -458,-1474 v1(-381,-1474)
NetJP2_3: JP2.3 R31.2 | length 1314.2
  Top Layer w10: v1(-219,-1476) -131.6,-1476 JP2.3@-56.34,-1551.26
  Bottom Layer w10: R31.2@-1252.5,-1360 -1252.5,-1389.5 -1226,-1416 -830.25,-1416 -803.25,-1443 -611,-1443 -585,-1417 -278,-1417 v1(-219,-1476)
NetJP2_4: JP2.4 R35.2 | length 1161.2
  Top Layer w10: JP2.4@-56.34,-1630 -18.34,-1668 43.77,-1668 77,-1634.77 77,-1114 v1(65,-1102)
  Bottom Layer w10: R35.2@-195,-1015 -195,-987 -144,-987 -100,-943 -100,-927 -92,-919 -44,-919 -36.45,-926.55 -36.45,-958.81 19.38,-1014.65 46.65,-1014.65 65,-1033 v1(65,-1102)
NetJP2_5: JP2.5 R32.2 | length 213.7
  Bottom Layer w10: JP2.5@-135.08,-1551.26 -105,-1521.18 R32.2@-105,-1350
NetJP2_6: JP2.6 R36.2 | length 1469.3
  Top Layer w10: v1(-335.03,-1200.68) -75.46,-1200.68 65,-1060.21 104.21,-1060.21 105,-1635.06 56.06,-1684 -81.08,-1684 JP2.6@-135.08,-1630
  Bottom Layer w10: R36.2@-445,-1190.28 -345.42,-1190.28 v1(-335.03,-1200.68)
NetJP2_7: JP2.7 R33.2 | length 431.3
  Bottom Layer w10: JP2.7@-213.82,-1551.26 -154,-1491.44 -154,-1257 -105,-1208 R33.2@-105,-1165
NetJP2_8: JP2.8 R37.2 | length 2624.5
  Top Layer w10: JP2.8@-213.82,-1630 -143.82,-1700 68.34,-1700 126,-1642.34 126,-992 v1(142,-976)
  Bottom Layer w10: R37.2@-1162.5,-1165 -1162.5,-985 -1125.5,-948 -439,-948 -427.32,-936.32 -124,-936.32 -116,-928.32 -116,-911 -108,-903 69,-903 v1(142,-976)
NetOSC2_1: OSC2.1 U10.2 | length 1902.6
  Top Layer w10: OSC2.1@647.05,-1031.06 690,-1031.06 690,-1480.68 674,-1496.68 674,-1823.36 688.64,-1838 792.78,-1838 795.71,-1835.07 798.44,-1832.34 819.99,-1394.8 820,-1394.31 U10.2@820,-905
NetOSC2_2: OSC2.2 U10.1 | length 133.7
  Top Layer w10: OSC2.2@647.05,-931.06 743.94,-931.06 U10.1@770,-905
NetPWM_A: PWM.A R9X.2 | length 305
  Top Layer w10: v1(-1470,-40) PWM.A@-1295,-40
  Bottom Layer w10: R9X.2@-1470,-170 v1(-1470,-40)
NetR4_2: R4.2 RUN.A | length 1128.9
  Top Layer w10: v1(-55,-274.31) -55,-119.7 v1(-12.15,-76.85)
  Bottom Layer w10: RUN.A@-631.26,-353.74 -598.51,-321 -303,-321 -266.31,-357.69 -138.38,-357.69 v1(-55,-274.31) ; v1(-12.15,-76.85) -39,-50 -39,73 -17,95 R4.2@65,95
NetR9X_1: R9X.1 U6.4 | length 1244.4
  Top Layer w10: v1(-884,-210.82) -875.31,-219.52 -875.31,-677.07 U6.4@-830.44,-721.94
  Bottom Layer w10: R9X.1@-1560,-170 -1555,-170 -1555,-201 -1545.18,-210.82 v1(-884,-210.82)
NetR10_2: R10.2 R16.2 U7.25 | length 690.5
  Top Layer w10: v1(1290.26,-782.66) 1460,-782.66 1476,-798.66 1476,-880.43 1456,-900.43 U7.25@1414,-900.43
  Bottom Layer w10: R10.2@1245,-1110 R16.2@1245,-944.72 1245,-827.92 v1(1290.26,-782.66)
NetRESET_2: RESET.2 Rkx.2 U9.1 | length 480.8
  Top Layer w10: RESET.2@-1859.09,1340 -1749.09,1450 U9.1@-1581.22,1450
  Bottom Layer w10: RESET.2@-1859.09,1340 -1805,1340 -1785,1360 Rkx.2@-1710,1360
NetU7_5: U7.5 U7.6 | length 25.6
  Top Layer w10: U7.6@1176,-951.61 U7.5@1176,-926.02
NetU7_22: U7.22 U7.28 | length 240.2
  Top Layer w10: U7.22@1414,-977.2 1380,-977.2 1358,-955.2 1358,-845 1379.34,-823.66 U7.28@1414,-823.66
NetU7_23: U7.23 U7.24 | length 25.6
  Top Layer w10: U7.23@1414,-951.61 U7.24@1414,-926.02
PWMA1: JP2.19 U1.5 U6.3 | length 1973.1
  Top Layer w10: U6.3@-848.53,-740.04 -848.53,-743.7 U6.3@-825.4,-766.83 ; JP2.19@-686.26,-1551.26 -710,-1551.26 -710,-1529 -726,-1513 -861,-1513 -881.51,-1533.51 -881.51,-1579.51 -892,-1590 -940,-1590 -961,-1569 -961,-1219 -824,-1082 -824,-768.23 U6.3@-825.4,-766.83 ; U1.5@-579.36,-188.26 -579.36,-192.19 -682.51,-295.34 -682.51,-346.31 -729,-392.8 -729,-714 -780,-765 -823.57,-765 U6.3@-825.4,-766.83
PWMA2: JP2.20 U1.7 | length 1483.3
  Top Layer w10: JP2.20@-686.26,-1630 -663,-1630 -663,-1598 -648,-1583 -648,-558 -609,-519 -609,-273.58 U1.7@-551.52,-216.1
PWMA3: JP2.21 U1.11 | length 1716.4
  Top Layer w10: JP2.21@-765,-1551.26 -724.76,-1591.5 -724.76,-1659.01 -716,-1667.77 -588,-1667.77 -569,-1648.77 -569,-1519 -518,-1468 -518,-1235 -523,-1230 -523,-1025 -518,-1020 -518,-786.13 -534,-770.13 -534,-587 -527,-580 -527,-302.93 U1.11@-495.84,-271.78
PWMA4: JP2.22 U1.13 | length 1711.6
  Top Layer w10: JP2.22@-765,-1630 -740.76,-1654.24 -740.76,-1675.01 -732,-1683.77 -523.77,-1683.77 -491,-1651 -491,-1523 -502,-1512 -502,-1219 -507,-1214 -507,-1041 -502,-1036 -502,-770.13 -518,-754.13 -518,-637.01 -503,-622 -503,-331 -471.61,-299.61 U1.13@-468,-299.61
PWMA5: JP2.23 U1.17 | length 1954.8
  Top Layer w10: JP2.23@-843.74,-1551.26 -812,-1551.26 -803,-1560.26 -803,-1656.82 -760.05,-1699.77 -459.77,-1699.77 -412,-1652 -412,-1522 -419,-1515 -436,-1515 -486,-1465 -486,-1208 -491,-1203 -491,-1062 -486,-1057 -486,-754.13 -502,-738.13 -502,-668.01 -487,-653.01 -487,-429.97 U1.17@-412.32,-355.29
PWMA6: JP2.24 U1.19 | length 2029.3
  Top Layer w10: JP2.24@-843.74,-1630 -843.74,-1673 -800.85,-1715.89 -397.11,-1715.89 -333,-1651.77 -333,-1513 -347,-1499 -422,-1499 -459,-1462 -459,-1196 -475,-1180 -475,-1073 -459,-1057 -459,-751 -486,-724 -486,-679 -469,-662 -469,-471.57 -384.49,-387.06 U1.19@-384.49,-383.13
PWMB1: JP2.25 U1.6 | length 1512.4
  Top Layer w10: JP2.25@-922.48,-1551.26 -897.51,-1551.26 -897.51,-1338.51 -670,-1111 -670,-537 -625,-492 -625,-260.46 -566.72,-202.18 U1.6@-565.44,-202.18
PWMB2: JP2.26 U1.10 | length 1732.5
  Top Layer w10: v1(-544,-1458) -544,-874 -535,-865 -535,-810 -551,-794 -551,-470 -543,-462 -543,-289.81 -511.04,-257.86 U1.10@-509.76,-257.86
  Bottom Layer w10: JP2.26@-922.48,-1630 -922.48,-1620 -892,-1620 -884,-1612 -884,-1529 -864,-1509 -595,-1509 v1(-544,-1458)
PWMB3: JP2.27 U1.12 | length 1892
  Top Layer w10: JP2.27@-1001.22,-1551.26 -1001.22,-1532.49 -990,-1532.49 -990,-743 -943,-696 v1(-943,-284.31) ; U1.12@-481.92,-285.7 -445,-248.77 v1(-445,-228)
  Bottom Layer w10: v1(-943,-284.31) -720.31,-284.31 -664,-228 v1(-445,-228)
PWMB4: JP2.28 U1.16 | length 2153.2
  Top Layer w10: v1(-1239,-432) -1239,-759 -1040,-958 -1040,-1591.22 JP2.28@-1001.22,-1630 ; v1(-478,-381) -461.94,-381 -426.24,-345.3 U1.16@-426.24,-341.37
  Bottom Layer w10: v1(-1239,-432) -1221.8,-414.8 -615.51,-414.8 -576.71,-376 -483,-376 v1(-478,-381)
PWMB5: JP2.29 U1.18 | length 2723.4
  Top Layer w10: v1(-1260,-159) -1324,-159 -1350,-185 -1350,-269 -1335,-284 -1335,-1273 -1093,-1515 -1093,-1551.26 JP2.29@-1079.96,-1551.26 ; U1.18@-398.41,-369.21 -328,-298.81 v1(-328,-242)
  Bottom Layer w10: v1(-1260,-159) -1233,-186 -1115,-186 -1098,-169 -401,-169 v1(-328,-242)
PWMB6: JP2.30 U1.20 | length 2706.7
  Top Layer w10: v1(-1419,-431) -1419,-1227 -1198,-1448 -1198,-1644.12 -1194,-1648.12 -1194,-1662 -1164,-1692 -1141.96,-1692 JP2.30@-1079.96,-1630 ; U1.20@-370.57,-397.05 -366.64,-397.05 -328,-358.41 v1(-328,-346)
  Bottom Layer w10: v1(-1419,-431) -1290,-431 -1264,-457 -1084.98,-457 -1058.98,-431 -609.08,-431 -570.08,-392 -503,-392 -489,-406 -458,-406 -454,-402 -384,-402 v1(-328,-346)
R/W: JP1.41 R21.2 | length 3378.9
  Bottom Layer w10: JP1.41@-2325,758.7 -2219.7,864 -1910,864 -1751,1023 -1685.54,1023 -1676.54,1032 -1433.46,1032 -1424.46,1023 -1402,1023 -1338,959 -1337.87,955.05 -1331.13,752.95 -1331,749 -1323,741 -141.36,741 -37.02,636.67 -28.84,636.67 27.1,580.72 68.28,580.72 131,518 131,408.69 236,303.69 308,303.69 352.18,259.51 R21.2@352.18,171.18
RD: JP1.39 R20.2 | length 3394.3
  Bottom Layer w10: JP1.39@-2325,679.96 -2325,703 -2305,703 -2160,848 -1887,848 -1728,1007 -1678.91,1007 -1669.91,1016 -1440.09,1016 -1431.09,1007 -1427,1007 -1419,999 -1419,943 -1438,924 -1438,799 -1356,717 -1356,699 -1324,667 -775,667 -714,606 -73,606 76,457 76,396 25,345 25,261 52,234 218,234 R20.2@241.46,257.46
RESET: JP1.54
RST: JP1.55
RST/: R26.1 U1.80 U1.138 | length 1711.7
  Top Layer w10: v1(-144,122.82) -117,149.82 -117,268 -94,291 v1(-94,436) ; U1.138@-106.1,521.63 -65.47,481 v1(-49,481) ; U1.80@575.95,-243.94 579.88,-243.94 610.94,-275 637,-275 v1(643,-269)
  Bottom Layer w10: v1(-144,122.82) -144,-15 -33,-126 206.43,-126 R26.1@206.43,-126.89 206.43,-187.75 219,-200.32 219,-279 224,-284 317,-284 351,-250 399,-250 420,-229 466,-229 487,-250 624,-250 v1(643,-269) ; v1(-94,436) v1(-49,481)
RXDB: JP2.49 U1.63 | length 3606
  Top Layer w10: JP2.49@-1867.36,-1551.26 -1867.36,-1523.91 -1784,-1440.54 -1784,-864 -1651,-731 -1651,-544 -1420,-313 -1420,-144 v1(-1359,-83) ; v1(292,-346) 292,-437.17 335.4,-480.57 U1.63@339.32,-480.57
  Bottom Layer w10: v1(-1359,-83) -995.5,-83 -982.5,-70 -543,-70 -528,-85 -296,-85 -260,-121 -84.95,-121 -6.55,-199.39 113.39,-199.39 260,-346 v1(292,-346)
RXDC: JP2.51 U1.113 | length 4064.7
  Top Layer w10: JP2.51@-1946.1,-1551.26 -1946.1,-1304.1 -1820,-1178 v1(-1820,-775) ; v1(80,-610) 79,-609 79,-140 145,-74 145,114.59 353.24,322.83 U1.113@353.24,326.76
  Bottom Layer w10: v1(-1820,-775) -1666,-775 -1634,-743 -544,-743 -470.01,-669.01 -425.99,-669.01 -397,-698 -310.28,-698 -257.28,-645 -32.59,-645 62.41,-550 124,-550 135,-561 135,-601 119,-617 80,-617 v1(80,-610)
SCLA: JP2.54 R28.2 U1.75 U10.6 | length 5876.5
  Top Layer w10: U1.75@506.36,-313.53 539,-346.18 538,-347.18 538,-367 527,-378 527,-491 v1(515,-503) ; U10.6@870,-685 870,-745 915.14,-790.14 1060,-790.14 1100,-750.14 v1(1100,-743)
  Bottom Layer w10: JP2.54@-2024.84,-1630 -1811.84,-1843 502.58,-1843 880,-1465.58 R28.2@880,-1401.95 1098.05,-1401.95 1127,-1373 1130.5,-773.5 ; v1(515,-503) 1280,-503 1324,-547 1324,-721 1316,-729 1175,-729 1130.5,-773.5 ; v1(1100,-743) 1130.5,-773.5
SDAA: JP2.53 R29.2 U1.74 U10.5 | length 5530.9
  Top Layer w10: JP2.53@-2024.84,-1551.26 v1(-2024.84,-1080.84) ; v1(442,-288) 442,-296.63 465.54,-296.63 492.44,-323.53 U1.74@492.44,-327.45 ; v1(920,-756.57) 920,-729 ; v2(1005,-745) 936,-745 920,-729 ; v1(1124,-384) 920,-588 U10.5@920,-685 920,-729
  Bottom Layer w10: v1(-2024.84,-1080.84) -1848,-904 -1419,-904 -1415,-900 -500,-900 -487,-887 -188.15,-887 -152.15,-851 -4.5,-851 7.5,-839 411.57,-839 424.25,-851.69 854.65,-851.69 920,-786.33 v1(920,-756.57) ; v1(442,-288) 442,-302.34 548,-408.34 580,-408.34 604.34,-384 v1(1124,-384) ; v2(1005,-745) 1015,-735 1062.01,-735 1072.01,-745 1072.01,-787 1060,-799.01 R29.2@1060,-1245
SPICLKA: JP2.43 U1.98 | length 5422.3
  Top Layer w10: JP2.43@-1631.14,-1551.26 -1631.14,-1487.27 -1534.5,-1390.63 -1534.5,-1140 -1509.93,-1115.43 v1(-1507,-856) ; U1.98@562.03,117.97 562.03,121.89 593,152.86 593,222 585,230 585,840 596,851 623,851 635,839 635,808 627,800 627,259 770,116 770,-368 582,-556 v1(582,-749)
  Bottom Layer w10: v1(-1507,-856) -1505,-854 -1441.63,-854 -1434.63,-847 -611,-847 -590,-868 -519,-868 -504,-853 -253,-853 -219,-819 -36.5,-819 -24.5,-807 456,-807 514,-749 v1(582,-749)
SPISETA: U1.99
SPISIMOA: JP2.41 U1.96 | length 5686.1
  Top Layer w10: v1(-1809,-1411) -1800,-1402 -1800,-849 -1667,-716 -1667,-494 -1599,-426 v1(-1599,53) ; v1(-1739,386) v1(-1296,829) ; U1.96@589.87,90.13 589.87,94.06 632,136.18 610,158.18 v1(610,826)
  Bottom Layer w10: v1(-1809,-1411) -1590.4,-1411 -1552.4,-1449 JP2.41@-1552.4,-1551.26 ; v1(-1739,386) -1739,112 -1680,53 v1(-1599,53) ; v1(-1296,829) -707.64,829 -698.64,820 -681.36,820 -671.36,810 -506.59,810 -493.59,823 -144.17,823 -140.92,819.75 43.87,819.75 62.12,838 472.36,838 484.36,826 v1(610,826)
SPISOMIA: JP2.42 U1.97 | length 4451.1
  Top Layer w10: JP2.42@-1552.4,-1630 -1533.63,-1630 -1533.63,-1592 -1514.63,-1573 -1514.63,-1529 -1444,-1458.37 v1(-1444,-879) ; v1(527,18) 516.02,28.98 516.02,48.05 572.02,104.05 U1.97@575.95,104.05 ; v1(607.06,-777.94) 607.06,-745.94 805,-548 805,107.14 817,119.14 v1(817,122)
  Bottom Layer w10: v1(-1444,-879) -1428,-863 -627,-863 -606,-884 -507,-884 -492,-869 -238.68,-869 -204.68,-835 -21,-835 -9,-823 562,-823 v1(607.06,-777.94) ; v1(527,18) 585,76 660,76 779,195 805,195 817,183 v1(817,122)
SPISTEA: JP2.44
SRAMCS: U5.6
SYSRUN: RUN.K U1.67 | length 1335.9
  Top Layer w10: v1(344.11,-374) U1.67@395,-424.89
  Bottom Layer w10: RUN.K@-755,-230 -723,-198 -412,-198 -343,-267 -332,-267 -260,-339 -177,-339 -82,-244 71,-244 201,-374 v1(344.11,-374)